# EAGLE board 8051 with lcd (EAGLE 6.1)
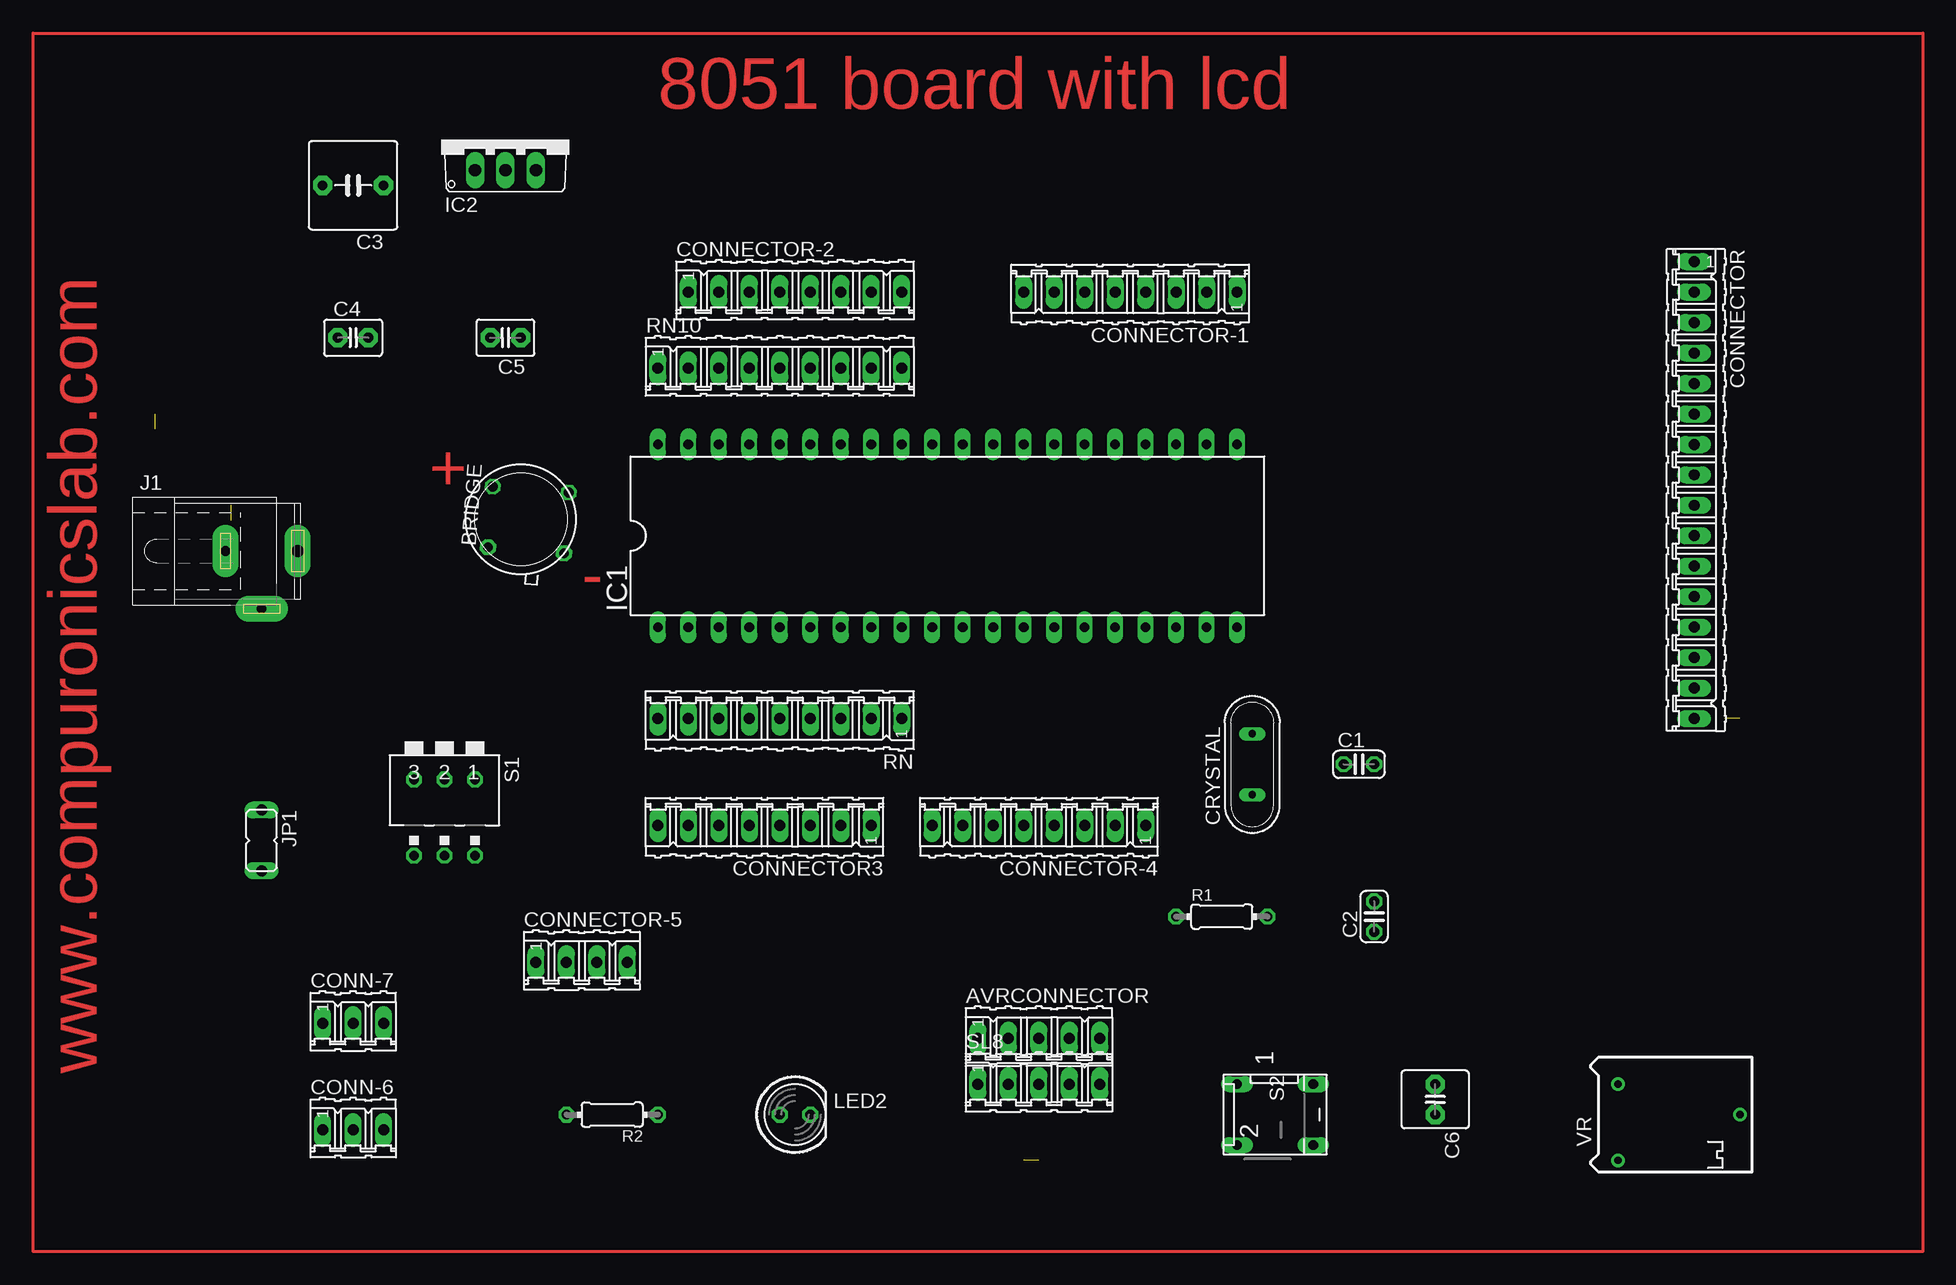
[diagram p0: board, top side]
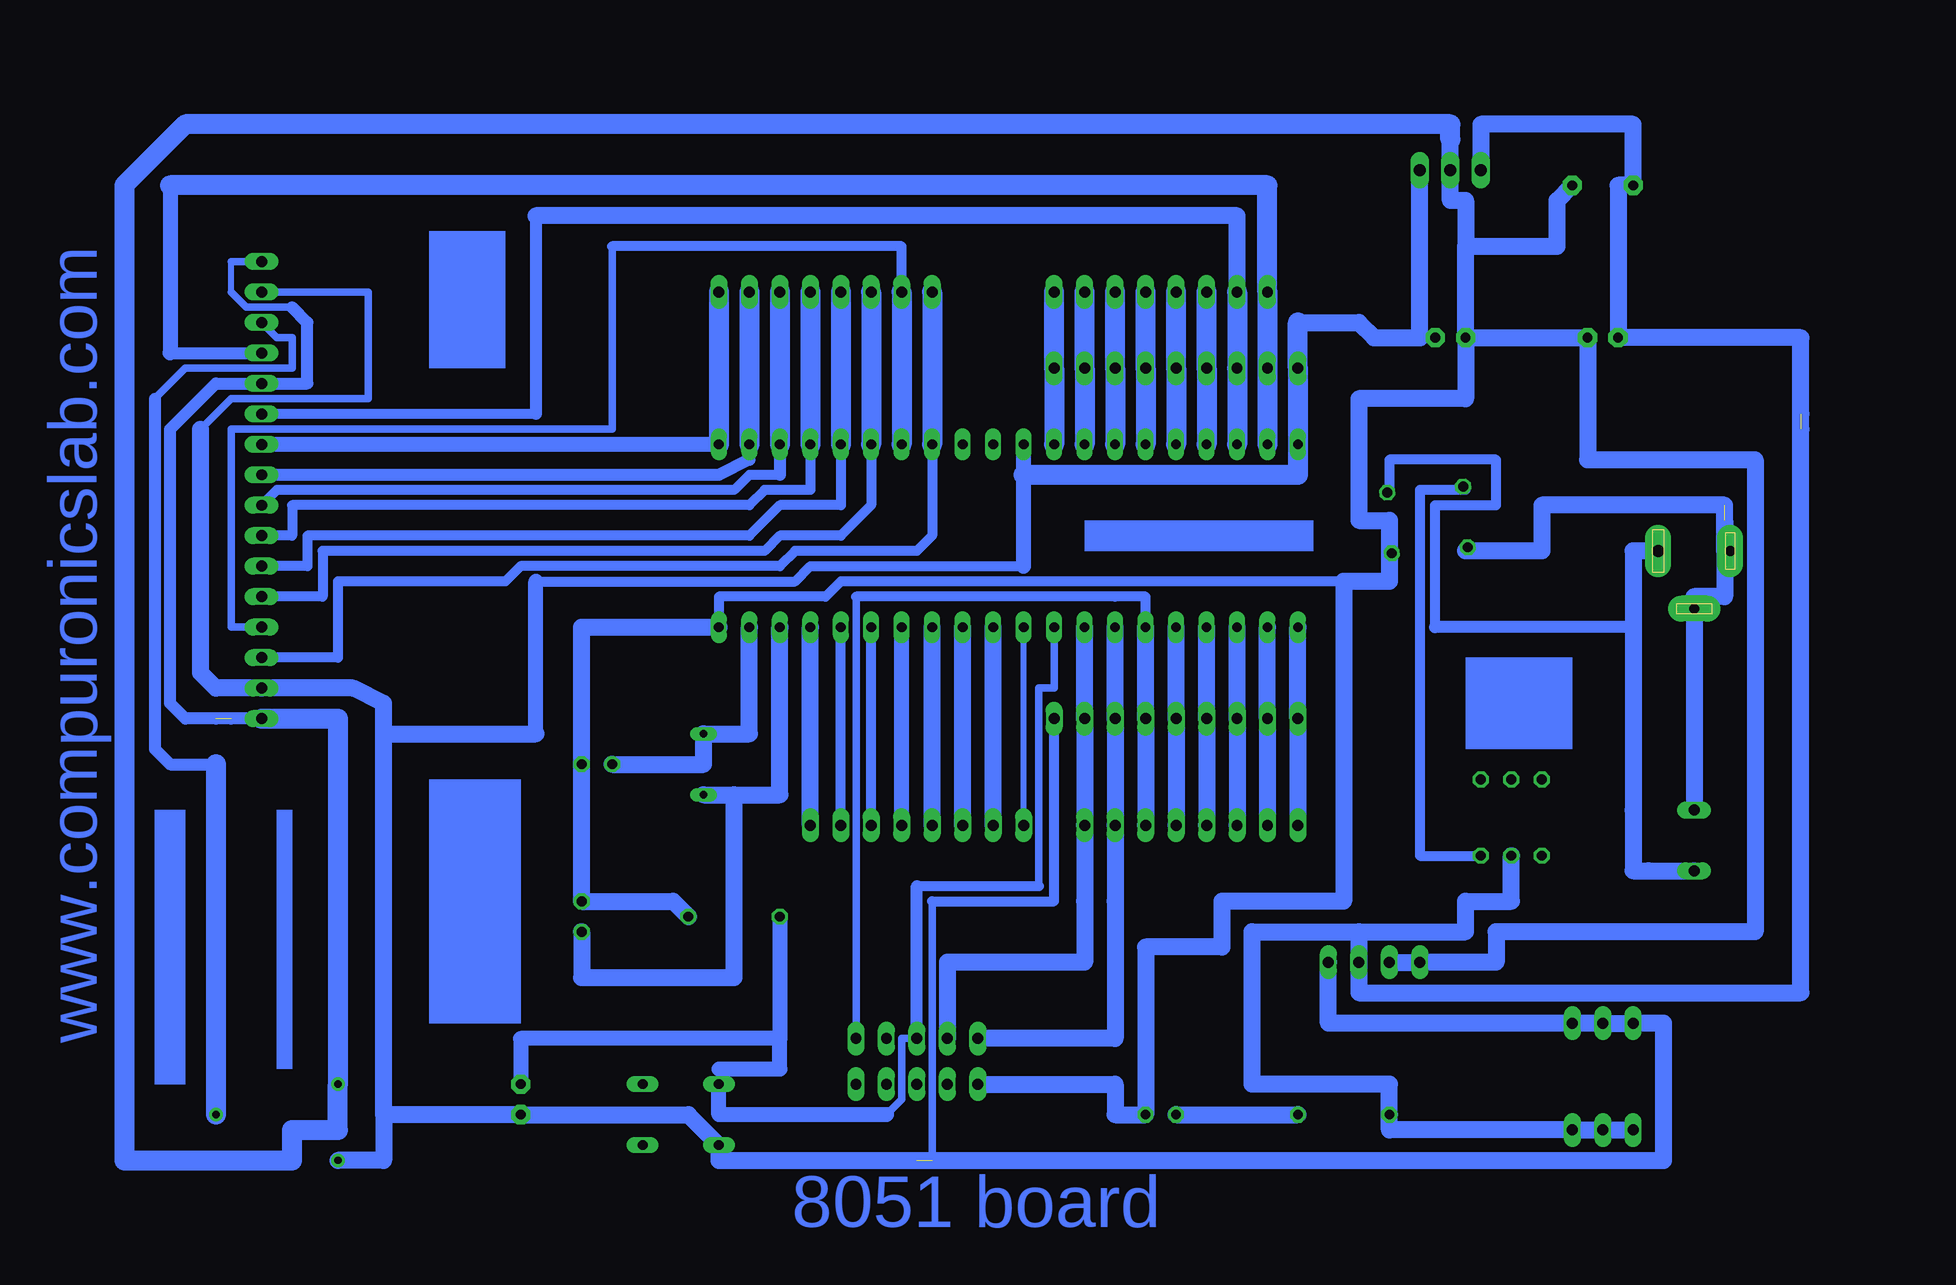
[diagram p1: board, bottom side, seen from below]

No outline drawn. Coordinates in mm, seen from the top.
Copper layers (1*16): Top 0.035mm / dielectric 1.5mm / Bottom 0.035mm
Design rules: minimum track width 20mil, minimum drill 24mil, track to track 20mil, track to pad 8mil, pad to pad 8mil, via to via 8mil, smd to smd 8mil, copper to edge 20mil, drill to drill 8mil, minimum pad ring 10mil, minimum via ring 8mil, stop-mask expansion 8mil, vias tented up to drill 0mil, thermal gap 20mil

## Footprints (pad centres in the part's own frame; a part is rotated, then mirrored left to right if it is on the bottom)
05P = drill 0.914 long: 1 -5.08,0; 2 -2.54,0; 3 0,0; 4 2.54,0; 5 5.08,0
TO39/4 = drill 0.813 octagon: 1 -2.54,-2.54; 2 2.54,-2.54; 3 2.54,3.81; 4 -2.54,3.81
C025-024X044 = drill 0.813 octagon: 1 -1.27,0; 2 1.27,0
C5B7.2 = drill 0.813 pad 1.6 octagon: 1 -2.54,0; 2 2.54,0
C2.5-3 = drill 0.813 pad 1.6 octagon: 1 -1.27,0; 2 1.27,0
C2.5-6 = drill 0.813 pad 1.6 octagon: 1 -1.27,0; 2 1.27,0
03P = drill 0.914 long: 1 -2.54,0; 2 0,0; 3 2.54,0
16P = drill 0.914 long: 1 -19.05,0; 2 -16.51,0; 3 -13.97,0; 4 -11.43,0; 5 -8.89,0; 6 -6.35,0; 7 -3.81,0; 8 -1.27,0; 9 1.27,0; 10 3.81,0; 11 6.35,0; 12 8.89,0; 13 11.43,0; 14 13.97,0; 15 16.51,0; 16 19.05,0
08P = drill 0.914 long: 1 -8.89,0; 2 -6.35,0; 3 -3.81,0; 4 -1.27,0; 5 1.27,0; 6 3.81,0; 7 6.35,0; 8 8.89,0
04P = drill 0.914 long: 1 -3.81,0; 2 -1.27,0; 3 1.27,0; 4 3.81,0
QS = drill 0.61 long: 1 -2.54,0; 2 2.54,0
DIL40 = drill 0.813 long: 1 -24.13,-7.62; 2 -21.59,-7.62; 3 -19.05,-7.62; 4 -16.51,-7.62; 5 -13.97,-7.62; 6 -11.43,-7.62; 7 -8.89,-7.62; 8 -6.35,-7.62; 9 -3.81,-7.62; 10 -1.27,-7.62; 11 1.27,-7.62; 12 3.81,-7.62; 13 6.35,-7.62; 14 8.89,-7.62; 15 11.43,-7.62; 16 13.97,-7.62; 17 16.51,-7.62; 18 19.05,-7.62; 19 21.59,-7.62; 20 24.13,-7.62; 21 24.13,7.62; 22 21.59,7.62; 23 19.05,7.62; 24 16.51,7.62; 25 13.97,7.62; 26 11.43,7.62; 27 8.89,7.62; 28 6.35,7.62; 29 3.81,7.62; 30 1.27,7.62; 31 -1.27,7.62; 32 -3.81,7.62; 33 -6.35,7.62; 34 -8.89,7.62; 35 -11.43,7.62; 36 -13.97,7.62; 37 -16.51,7.62; 38 -19.05,7.62; 39 -21.59,7.62; 40 -24.13,7.62
TO220V = drill 1.016 long: 1 -2.54,-2.54; 2 0,-2.54; 3 2.54,-2.54
SPC4077 = drill 0.8 pad 2.184 long: 1 -3,0; 2 0,-4.8 | drill 1 pad 2.184 long: 3 3,0
JP1 = drill 0.914 long: 1 0,-2.54; 2 0,2.54
LED5MM = drill 0.813 octagon: A -1.27,0; K 1.27,0
0204/7 = drill 0.813 octagon: 1 -3.81,0; 2 3.81,0
09P = drill 0.914 long: 1 -10.16,0; 2 -7.62,0; 3 -5.08,0; 4 -2.54,0; 5 0,0; 6 2.54,0; 7 5.08,0; 8 7.62,0; 9 10.16,0
DA-03 = drill 0.813 octagon: 1 -2.54,-5.08; 2 0,-5.08; 3 2.54,-5.08; 4 2.54,1.27; 5 0,1.27; 6 -2.54,1.27
DP-02 = drill 0.813 long: 1 -2.54,-2.54; 2 2.54,-2.54; 3 2.54,3.81; 4 -2.54,3.81
RTRIM64P = drill 0.61: 1 -2.54,-3.81; 2 7.62,0; 3 -2.54,2.54

## Placement (x,y rotation side)
AVRCONNECTOR  [05P]  60.96,3.81 0 top
BRIDGE  [TO39/4]  19.05,46.99 85.6 top
C1  33pf  [C025-024X044]  87.63,26.67 0 top
C2  33pf  [C025-024X044]  88.9,13.97 90 top
C3  470uf  [C5B7.2]  3.81,74.93 180 top
C4  .01uf  [C2.5-3]  3.81,62.23 0 top
C5  4.7uf  [C2.5-3]  16.51,62.23 180 top
C6  0.1uf  [C2.5-6]  93.98,-1.27 270 top
CONN-6  3 pin  [03P]  3.81,-3.81 0 top
CONN-7  3 pin  [03P]  3.81,5.08 0 top
CONNECTOR  LCD  [16P]  115.57,49.53 270 top
CONNECTOR3  8 pin  [08P]  38.1,21.59 180 top
CONNECTOR-1  8 pin  [08P]  68.58,66.04 180 top
CONNECTOR-2  8 pin  [08P]  40.64,66.04 0 top
CONNECTOR-4  8 pin  [08P]  60.96,21.59 180 top
CONNECTOR-5  4 pin  [04P]  22.86,10.16 0 top
CRYSTAL  11.0592 mhz  [QS]  78.74,26.67 90 top
IC1  AT89S51  [DIL40]  53.34,45.72 0 top
IC2  7805TV  [TO220V]  16.51,78.74 0 top
J1  [SPC4077]  -3.81,44.45 0 top
JP1  TRANSFORMER  [JP1]  -3.81,20.32 180 top
LED2  5mm  [LED5MM]  40.64,-2.54 0 top
R1  10k  [0204/7]  76.2,13.97 0 top
R2  560E  [0204/7]  25.4,-2.54 180 top
RN  10K  [09P]  39.37,30.48 180 top
RN10  10 k  [09P]  39.37,59.69 0 top
S1  ON/ OFF SWITCH  [DA-03]  11.43,20.32 180 top
S2  push switch  [DP-02]  80.01,-2.54 270 top
SL8  [05P]  60.96,0 0 top
VR  10k  [RTRIM64P]  111.76,-2.54 0 top

## Library data of the parts
AVRCONNECTOR CONN-6 CONN-7 CONNECTOR CONNECTOR3 CONNECTOR-1 CONNECTOR-2 CONNECTOR-4 CONNECTOR-5 RN RN10 SL8 = con-amp-quick; OC_FARNELL: unknown; OC_NEWARK: unknown
BRIDGE IC2 = linear
C1 C2 = rcl
C3-C6 = capacitor-wima
CRYSTAL = special
IC1 = atmel; OC_FARNELL: unknown; OC_NEWARK: unknown
J1 = con-jack; OC_FARNELL: unknown; OC_NEWARK: unknown
JP1 = jumper
LED2 = led
R1 R2 = eagle-ltspice; SPICEMODEL: NONE; SPICEPREFIX: R
S1 = switch-dil; MPN: MCDA03; OC_FARNELL: 1521999; OC_NEWARK: 74M2972
S2 = switch-dil; MPN: MCDP02; OC_FARNELL: 1255233; OC_NEWARK: 26M1095
VR = resistor

## Nets
N$1: C2.1 CRYSTAL.1 IC1.18
N$2: C1.1 CRYSTAL.2 IC1.19
N$4: C3.2 C4.1 CONN-6.1 CONN-6.2 CONN-6.3 CONNECTOR-5.3 IC2.1 R2.2 S1.5
N$5: BRIDGE.2 J1.3 JP1.2
N$6: CONNECTOR-4.8 IC1.10
N$7: CONNECTOR-4.7 IC1.11
N$8: CONNECTOR-4.6 IC1.12
N$9: CONNECTOR-4.5 IC1.13
N$10: CONNECTOR-4.4 IC1.14
N$11: CONNECTOR-4.3 IC1.15
N$12: CONNECTOR-4.2 IC1.16
N$13: CONNECTOR-4.1 IC1.17
N$14: AVRCONNECTOR.3 C6.1 IC1.9 R1.1 S2.1
N$15: AVRCONNECTOR.1 CONNECTOR3.2 IC1.7 RN.3
N$16: BRIDGE.4 J1.1 J1.2 JP1.1
N$17: CONNECTOR3.4 IC1.5 RN.5
N$18: CONNECTOR3.5 IC1.4 RN.6
N$19: CONNECTOR3.6 IC1.3 RN.7
N$20: CONNECTOR3.7 IC1.2 RN.8
N$21: CONNECTOR3.8 IC1.1 RN.9
N$24: CONNECTOR-2.3 IC1.37 RN10.4
N$25: CONNECTOR-2.4 IC1.36 RN10.5
N$26: CONNECTOR-2.5 IC1.35 RN10.6
N$27: CONNECTOR-2.6 IC1.34 RN10.7
N$28: CONNECTOR-2.7 IC1.33 RN10.8
N$29: CONNECTOR-2.8 IC1.32 RN10.9
N$30: CONNECTOR-1.1 CONNECTOR.7 IC1.21
N$31: CONNECTOR-1.2 CONNECTOR.8 IC1.22
N$32: CONNECTOR-1.3 CONNECTOR.9 IC1.23
N$35: CONNECTOR-1.6 CONNECTOR.12 IC1.26
N$38: CONNECTOR.3 VR.2
N$39: C5.1 C6.2 CONN-7.1 CONN-7.2 CONN-7.3 CONNECTOR-5.4 CONNECTOR.2 CONNECTOR.15 IC1.31 IC1.40 IC2.3 RN10.1 RN.1 S2.2 VR.1
N$41: BRIDGE.1 C1.2 C2.2 C3.1 C4.2 C5.2 CONNECTOR-5.1 CONNECTOR-5.2 CONNECTOR.1 CONNECTOR.5 CONNECTOR.16 IC1.20 IC2.2 LED2.K R1.2 SL8.1 VR.3
N$42: AVRCONNECTOR.5 CONNECTOR3.3 IC1.6 RN.4
N$43: LED2.A R2.1
N$45: AVRCONNECTOR.2 CONNECTOR3.1 IC1.8 RN.2
N$47: BRIDGE.3 S1.6
N$48: CONNECTOR-2.2 CONNECTOR.6 IC1.38 RN10.3
N$51: CONNECTOR-1.4 CONNECTOR.10 IC1.24
N$52: CONNECTOR-1.5 CONNECTOR.11 IC1.25
N$54: CONNECTOR-1.7 CONNECTOR.13 IC1.27
N$55: CONNECTOR-1.8 CONNECTOR.14 IC1.28
N$58: CONNECTOR-2.1 CONNECTOR.4 IC1.39 RN10.2

## Tracks (layer width: path | path; a pad name or v marks a point on that pad's centre or on a via)
N$1
  Bottom 0.508: 76.2,24.13 CRYSTAL.1
  Bottom 1.422: 76.2,24.13 76.2,8.89 78.74,8.89 88.9,8.89 C2.1 | IC1.18 72.39,24.13 CRYSTAL.1
N$2
  Bottom 1.422: C1.1 78.74,26.67 CRYSTAL.2 74.93,29.21 IC1.19
N$3
  Top 0.254: -22.86,87.63 134.62,87.63 134.62,-13.97 -22.86,-13.97 -22.86,87.63
N$4  (1 unrouted)
  Bottom 1.422: IC2.1 13.97,80.01 1.27,80.01 C3.2 2.54,74.93 C4.1 -12.7,62.23 -12.7,54.61 | S1.5 11.43,15.24 15.24,15.24 15.24,12.7 24.13,12.7 | CONN-6.1 CONN-6.2 CONN-6.3 21.59,-3.81 R2.2 21.59,0 33.02,0 33.02,12.7 24.13,12.7 | 24.13,12.7 CONNECTOR-5.3 24.13,7.62 -12.7,7.62 -12.7,55.88
N$5
  Bottom 0.508: 21.59,49.53 BRIDGE.2
  Bottom 0.813: 21.59,49.53 21.59,52.07 12.7,52.07 12.7,48.26 17.78,48.26 17.78,38.1
  Bottom 1.016: 1.27,38.1 17.78,38.1
  Bottom 1.422: J1.3 1.27,44.45 1.27,38.1 1.27,22.86 1.27,17.78 0,17.78 JP1.2
N$6
  Bottom 0.508: CONNECTOR-4.8 IC1.10
N$7
  Bottom 1.422: CONNECTOR-4.7 IC1.11
N$8
  Bottom 1.422: CONNECTOR-4.6 IC1.12
N$9
  Bottom 1.422: CONNECTOR-4.5 IC1.13
N$10
  Bottom 1.27: CONNECTOR-4.4 IC1.14
N$11
  Bottom 0.813: CONNECTOR-4.3 IC1.15
N$12
  Bottom 0.813: CONNECTOR-4.2 IC1.16
N$13
  Bottom 1.422: CONNECTOR-4.1 IC1.17
N$14
  Bottom 0.508: 77.47,1.27 S2.1
  Bottom 0.61: IC1.9 49.53,33.02 50.8,33.02 50.8,16.51 | 63.5,-2.54 62.23,-1.27 62.23,3.81 AVRCONNECTOR.3
  Bottom 0.813: 60.96,16.51 50.8,16.51
  Bottom 1.016: AVRCONNECTOR.3 60.96,16.51
  Bottom 1.27: R1.1 72.39,3.81 | 77.47,1.27 72.39,1.27 72.39,3.81 | 72.39,3.81 93.98,3.81 C6.1 | S2.1 77.47,-2.54 63.5,-2.54
N$15
  Bottom 1.422: IC1.7 RN.3 CONNECTOR3.2 44.45,15.24 44.45,3.81 AVRCONNECTOR.1
N$16  (1 unrouted)
  Bottom 0.508: 15.24,44.45 BRIDGE.4 | -6.35,44.45 J1.1 | -3.81,40.64 J1.2
  Bottom 1.422: J1.2 JP1.1 | 15.24,44.45 8.89,44.45 8.89,48.26 -6.35,48.26 -6.35,44.45 | -6.35,46.99 -6.35,40.64 -3.81,40.64
N$17
  Bottom 1.422: IC1.5 RN.5 CONNECTOR3.4
N$18
  Bottom 1.422: IC1.4 RN.6 CONNECTOR3.5
N$19
  Bottom 1.422: IC1.3 RN.7 CONNECTOR3.6
N$20
  Bottom 1.422: IC1.2 RN.8 CONNECTOR3.7
N$21
  Bottom 1.422: IC1.1 RN.9 CONNECTOR3.8
N$24
  Bottom 1.676: IC1.37 RN10.4 CONNECTOR-2.3
N$25
  Bottom 1.676: IC1.36 RN10.5 CONNECTOR-2.4
N$26
  Bottom 1.676: IC1.35 RN10.6 CONNECTOR-2.5
N$27
  Bottom 1.676: IC1.34 RN10.7 CONNECTOR-2.6
N$28
  Bottom 1.676: IC1.33 RN10.8 CONNECTOR-2.7
N$29
  Bottom 1.676: IC1.32 RN10.9 CONNECTOR-2.8
N$30
  Bottom 1.27: IC1.21 CONNECTOR.7
  Bottom 1.676: CONNECTOR-1.1 IC1.21
N$31
  Bottom 0.508: IC1.22 74.93,52.07
  Bottom 1.016: CONNECTOR.8 77.47,50.8 74.93,52.07
  Bottom 1.676: CONNECTOR-1.2 IC1.22
N$32
  Bottom 0.813: CONNECTOR.9 114.3,49.53 76.2,49.53 74.93,50.8 72.39,50.8
  Bottom 1.016: IC1.23 72.39,50.8
  Bottom 1.676: CONNECTOR-1.3 IC1.23
N$35
  Bottom 0.813: CONNECTOR.12 110.49,40.64 110.49,44.45 73.66,44.45 72.39,45.72 67.31,45.72 64.77,48.26 IC1.26
  Bottom 1.676: CONNECTOR-1.6 IC1.26
N$38
  Bottom 0.61: 124.46,57.15 121.92,59.69 113.03,59.69 113.03,62.23 114.3,62.23 CONNECTOR.3
  Bottom 1.016: 124.46,57.15 124.46,27.94 123.19,26.67 119.38,26.67
  Bottom 1.676: 119.38,26.67 VR.2
N$39  (1 unrouted)
  Bottom 0.508: C5.1 19.05,62.23 | 52.07,50.8 IC1.31
  Bottom 0.61: 59.69,-6.35 59.69,15.24 | CONNECTOR.2 106.68,66.04 106.68,57.15 118.11,57.15 120.65,54.61
  Bottom 0.813: RN.1 49.53,15.24 59.69,15.24 | 52.07,43.18 69.85,43.18 71.12,41.91 92.71,41.91
  Bottom 1.27: 52.07,43.18 IC1.31 | 92.71,29.21 92.71,41.91
  Bottom 1.422: IC2.3 19.05,62.23 22.86,62.23 24.13,63.5 29.21,63.5 | CONNECTOR-5.4 26.67,5.08 CONN-7.3 CONN-7.2 CONN-7.1 -1.27,5.08 -1.27,-6.35 60.96,-6.35 | 105.41,-2.54 105.41,-6.35 VR.1 | 105.41,-2.54 C6.2 80.01,-2.54 S2.2 77.47,-6.35 59.69,-6.35 | 105.41,29.21 105.41,31.75 107.95,33.02 CONNECTOR.15 119.38,33.02 120.65,34.29 120.65,54.61 | 105.41,-2.54 105.41,29.21 | 105.41,29.21 92.71,29.21
  Bottom 1.676: 52.07,50.8 29.21,50.8 IC1.40 RN10.1 29.21,63.5
N$41  (1 unrouted)
  Bottom 0.508: 118.11,66.04 118.11,68.58 | 21.59,44.45 BRIDGE.1
  Bottom 0.61: 118.11,68.58 CONNECTOR.1 | 118.11,66.04 116.84,64.77 113.03,64.77
  Bottom 0.813: IC1.20 77.47,40.64 68.58,40.64 67.31,41.91 25.4,41.91
  Bottom 1.016: 118.11,30.48 121.92,30.48 123.19,31.75 123.19,54.61 119.38,58.42 CONNECTOR.5 111.76,58.42 111.76,63.5 113.03,64.77 | CONNECTOR.16 119.38,30.48
  Bottom 1.422: R1.2 81.28,15.24 C2.2 C1.2 88.9,38.1 IC1.20 | SL8.1 44.45,0 44.45,-2.54 LED2.K 41.91,11.43 35.56,11.43 35.56,15.24 25.4,15.24 25.4,41.91 21.59,41.91 21.59,44.45 21.59,46.99 24.13,46.99 24.13,57.15 15.24,57.15 C5.2 | CONNECTOR-5.2 CONNECTOR-5.1 12.7,10.16 12.7,12.7 -8.89,12.7 -8.89,52.07 5.08,52.07 C4.2 C5.2 | C5.2 15.24,69.85 | C3.1 7.62,73.66 7.62,69.85 15.24,69.85 | 15.24,69.85 15.24,73.66 16.51,73.66 IC2.2 16.51,78.74
  Bottom 1.676: CONNECTOR.16 109.22,30.48 VR.3 109.22,-3.81 113.03,-3.81 113.03,-6.35 127,-6.35 127,74.93 121.92,80.01 16.51,80.01 16.51,78.74
N$42
  Bottom 0.61: 66.04,40.64 AVRCONNECTOR.5
  Bottom 0.813: 66.04,40.64 44.45,40.64 41.91,40.64 IC1.6
  Bottom 1.422: IC1.6 RN.4 CONNECTOR3.3
N$43
  Bottom 1.422: LED2.A R2.1
N$45
  Bottom 1.422: IC1.8 RN.2 CONNECTOR3.1 46.99,15.24 46.99,10.16 58.42,10.16 58.42,8.89 AVRCONNECTOR.2
N$47
  Bottom 0.508: 15.24,49.53 BRIDGE.3
  Bottom 0.813: S1.6 19.05,19.05 19.05,24.13 19.05,49.53 15.24,49.53
N$48
  Bottom 0.813: 92.71,55.88 CONNECTOR.6
  Bottom 1.016: 92.71,72.39 92.71,55.88
  Bottom 1.422: 92.71,72.39 34.29,72.39 34.29,69.85 CONNECTOR-2.2
  Bottom 1.676: IC1.38 RN10.3 CONNECTOR-2.2
N$51
  Bottom 0.813: CONNECTOR.10 113.03,45.72 113.03,48.26 74.93,48.26 73.66,49.53 69.85,49.53 IC1.24
  Bottom 1.676: CONNECTOR-1.4 IC1.24
N$52
  Bottom 0.813: CONNECTOR.11 111.76,43.18 111.76,45.72 74.93,45.72 72.39,48.26 67.31,48.26 IC1.25
  Bottom 1.676: CONNECTOR-1.5 IC1.25
N$54
  Bottom 0.61: CONNECTOR.13 118.11,38.1 118.11,54.61 86.36,54.61 86.36,69.85
  Bottom 0.813: 86.36,69.85 62.23,69.85 CONNECTOR-1.7
  Bottom 1.676: CONNECTOR-1.7 IC1.27
N$55
  Bottom 0.813: CONNECTOR.14 109.22,35.56 109.22,41.91 95.25,41.91 93.98,43.18 72.39,43.18 71.12,44.45 60.96,44.45 59.69,45.72 IC1.28
  Bottom 1.676: CONNECTOR-1.8 IC1.28
N$58
  Bottom 1.016: 123.19,60.96 CONNECTOR.4
  Bottom 1.27: 123.19,74.93 123.19,60.96
  Bottom 1.676: IC1.39 RN10.2 CONNECTOR-2.1 31.75,74.93 123.19,74.93
(copper drawn outside any net)
  shapes: Bottom area x6

## Text on the board
Top: 8051 board with lcd | www.compuronicslab.com | + | -
Bottom: www.compuronicslab.com | 8051 board